# Altium PCB ESP32-PicoDK.PcbDoc
Units mil, origin at the board's own origin, x right, y up, seen from the top; angles counter-clockwise.
Board outline 2257.6 x 1417.32 mil, 2 copper layers (Top1, Bottom2), stack 40.202 mil thick; 44 components, 58 nets, 212 pads, 76 vias.
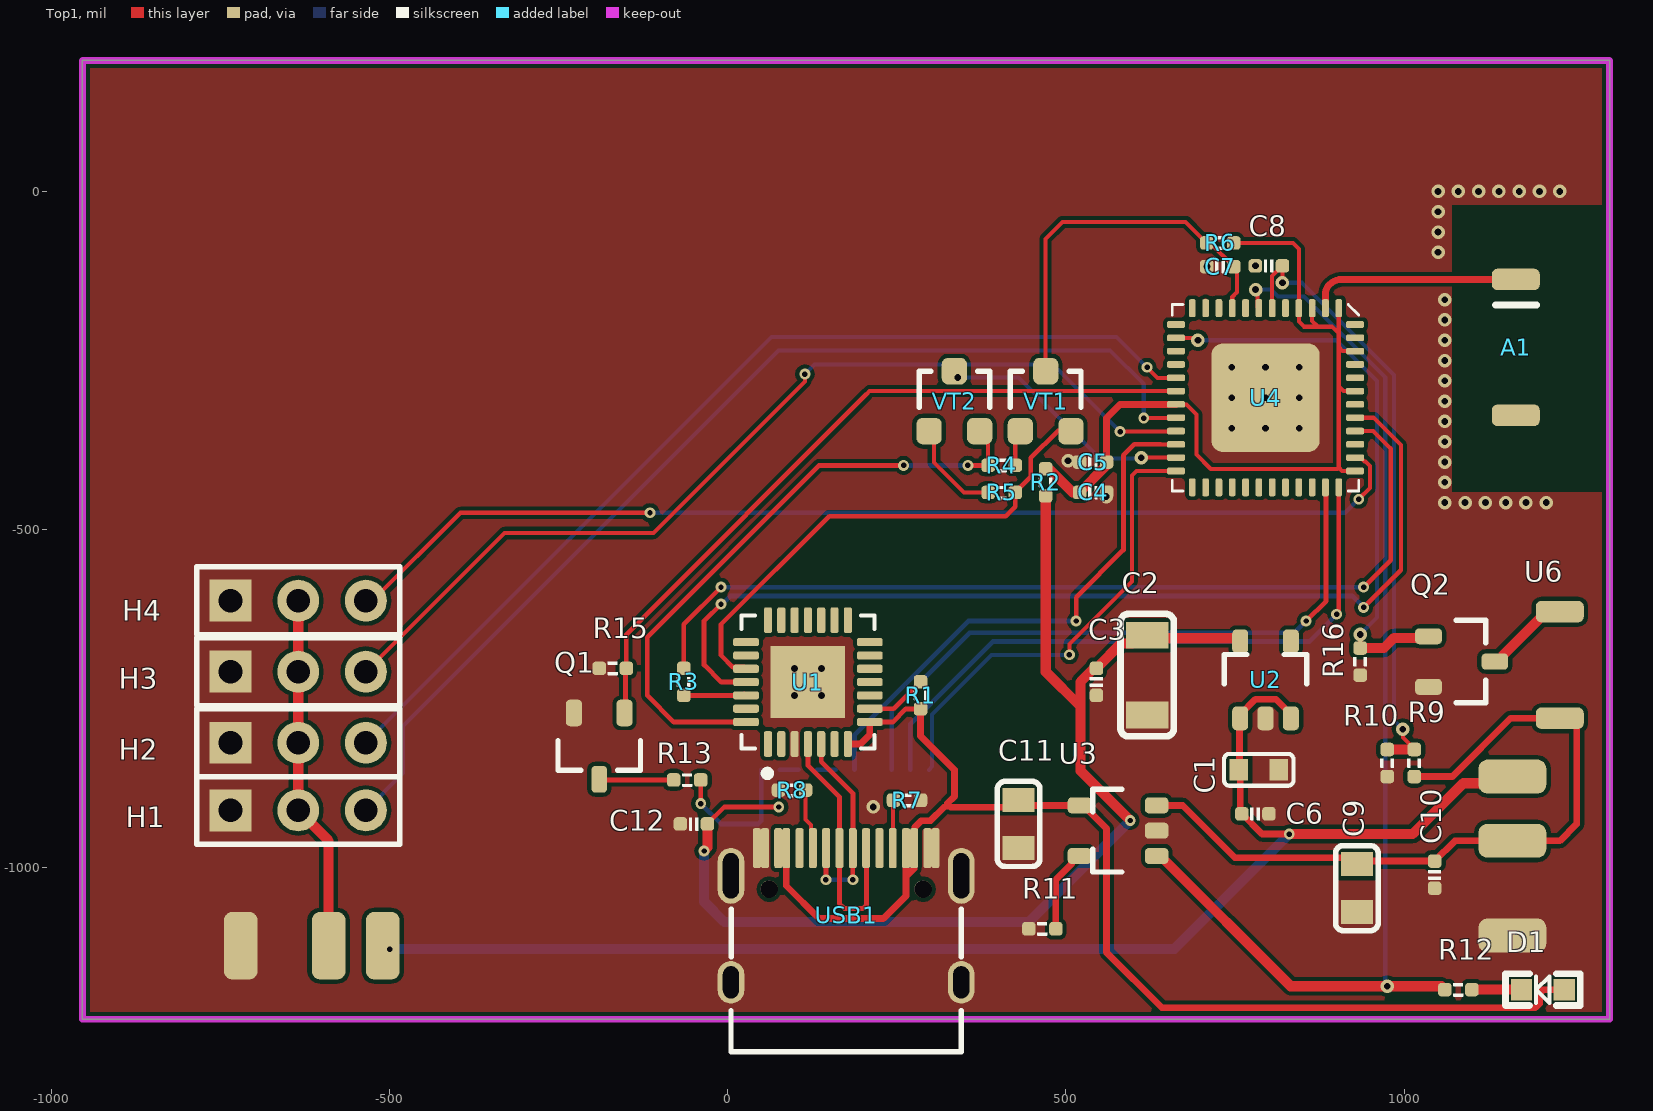
[diagram p0: Top1 view]
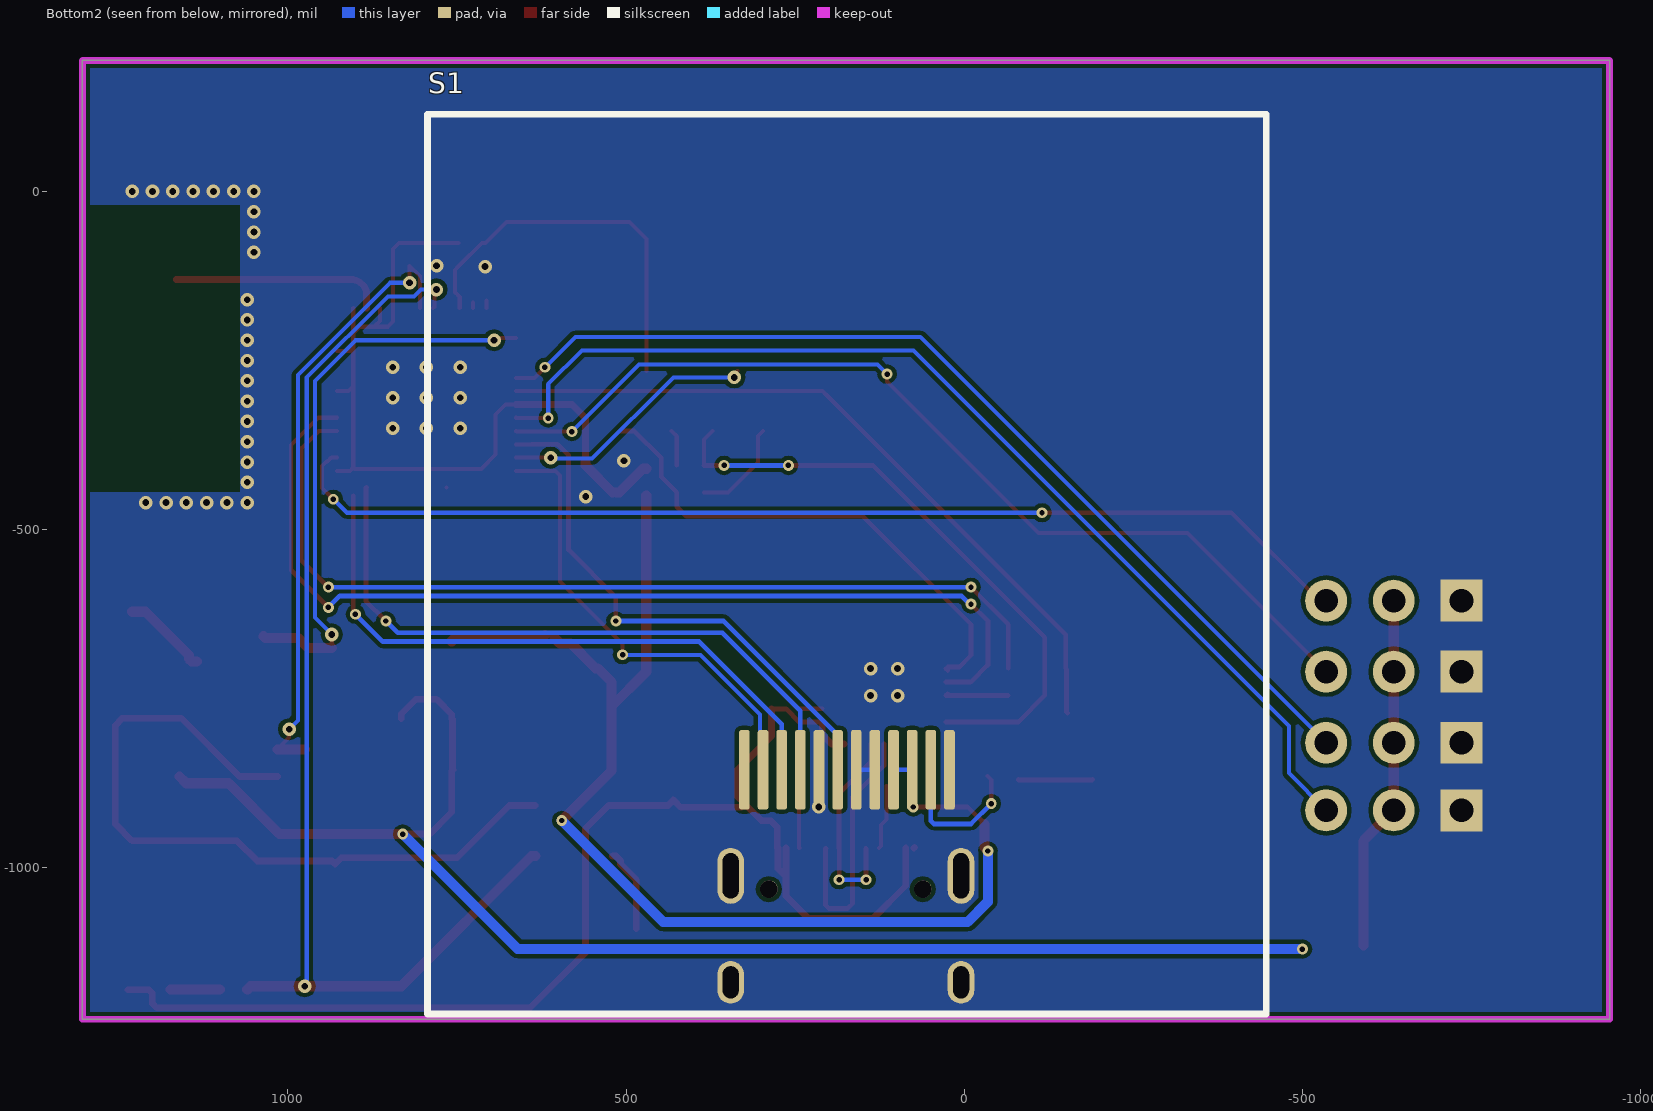
[diagram p1: Bottom2 view, seen from below]
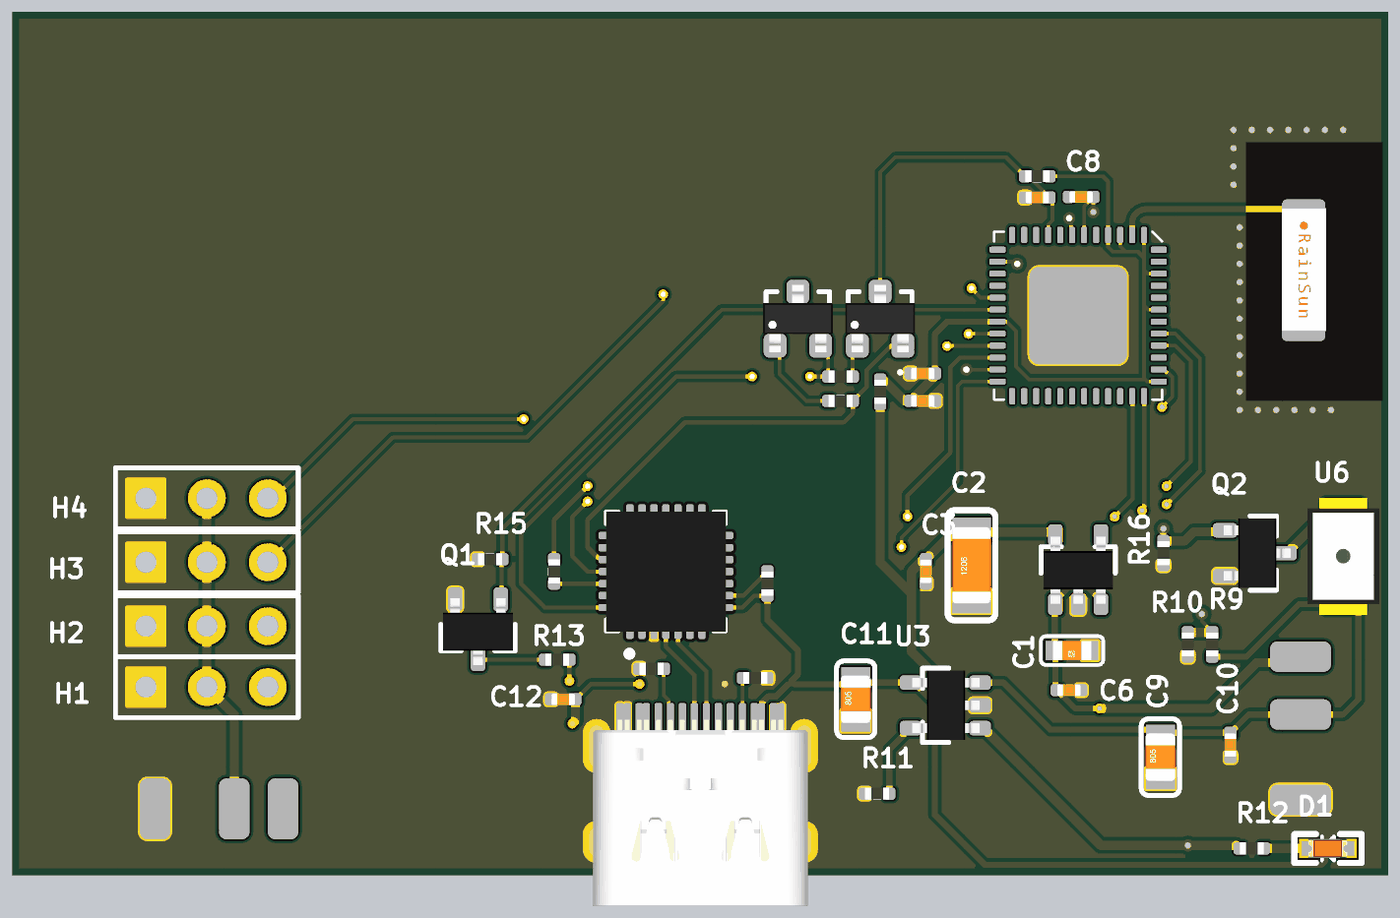
[diagram p2: 3D render of the assembled board from above, using the file's embedded part models]

## Layer stack, top to bottom
Top Solder: solder mask 0.4, Solder Resist, Dk 3.5
Top1: signal copper 1.4
Dielectric 1: core 37.4016, FR-4, Dk 4.2
Bottom2: signal copper 1.4
Bottom Solder: solder mask 0.4, Solder Resist, Dk 3.5

## Board outline
-954.01,-1223.65 -954.01,193.67 1303.59,193.67 1303.59,-1223.65

## Design rules (kind name [scope] priority, off if disabled: settings)
Clearance [All] p1: gap=6 ignorepadtopadclearanceinfootprint=FALSE
ComponentClearance [All] p1: gap=0 collisioncheckmode=3 verticalgap=0 showdistances=FALSE
DiffPairsRouting [All] p1: maxlimit=9 minlimit=9 mostfreqgap=9 toplayer_minwidth=4 toplayer_maxwidth=4 toplayer_prefwidth=4 bottomlayer_minwidth=4 bottomlayer_maxwidth=4 bottomlayer_prefwidth=4 maxuncoupledlength=500
FanoutControl Fanout_BGA [All] p1: bgadir=Out bgaviamode=Centered fanoutstyle=Auto fanoutdirection=Alternating viagrid=1 // Fanout_BGA (Default Rule)
HoleSize [All] p1: absolutevalues=TRUE maxlimit=10000 minlimit=8 maxpercent=80.000 minpercent=20.000
MinimumSolderMaskSliver [All] p1 off: minsoldermaskwidth=2
PlaneClearance [All] p1: clearance=8
PlaneConnect [All] p1: planeconnectstyle=Direct reliefexpansion=20 reliefentries=4 reliefconductorwidth=10 reliefairgap=10
PolygonConnect [All] p1: connectstyle=Direct reliefconductorwidth=10 reliefentries=4 polygonreliefangle="90 Angle" airgapwidth=10
RoutingVias [All] p1: holewidth=8 width=16 viastyle="Through Hole" minholewidth=6 minwidth=12 maxholewidth=28 maxwidth=50
SilkToBoardRegionClearance [All] p1 off:
SilkToSilkClearance [All] p1: silktosilkclearance=0
SilkToSolderMaskClearance [IsPad] p1: minsilkscreentomaskgap=0 clearancetoexposedcopper=TRUE
SolderMaskExpansion [All] p1: expansion=3
Width [All] p1: maxlimit=10000 minlimit=6 preferedwidth=7
20 further rules are at their usual default settings.

## Components (designator, comment, footprint, x,y, rotation, side; value= is the part's Value field where it differs from the comment)
A1 "RAINSUN" ANT-Rainsun-AN5120 1165,-230 r270 top
C1 "106" 电容_C0603 785,-855 r180 top
C2 "22uF" 电容_C1206 620,-715 r90 top
C3 "104" CAP_0402 545,-725 r90 top
C4 "10uF" CAP_0402 540,-445 r180 top value=0.1u
C5 "0.1uF" CAP_0402 540,-400 r0 top value=0.1u
C6 "104" CAP_0402 780,-920 r180 top
C7 "1uF" CAP_0402 728,-111.11 r180 top value=0.1u
C8 "0.1uF" CAP_0402 800,-110 r0 top value=0.1u
C9 "4.7UF" 电容_C0805 930,-1030 r90 top
C10 "104" CAP_0402 1045,-1010 r270 top
C11 "4.7UF" 电容_C0805 430,-935 r90 top
C12 "0.1uF" CAP_0402 -50,-935 r0 top value=0.1u
D1 "red" LED_0603 1205,-1180 r180 top
H1 "GP26-2520WV-3P" PIN2.54_1*3 -635,-915 r0 top
H2 "GP26-2520WV-3P" PIN2.54_1*3 -635,-815 r0 top
H3 "GP26-2520WV-3P" PIN2.54_1*3 -635,-710 r0 top
H4 "GP26-2520WV-3P" PIN2.54_1*3 -635,-605 r0 top
Q1 "AO3400A" SOT23-3 -190,-820 r270 top
Q2 "AO3400A" SOT23-3 1085,-695 r0 top
R1 "10K" RES_0402 285,-745 r90 top value=22R
R2 "0R" RES_0402 470,-430 r90 top value=22R
R3 "200R" RES_0402 -65,-725 r270 top value=22R
R4 "12K" RES_0402 405,-405 r0 top value=22R
R5 "12K" RES_0402 405,-445 r180 top value=22R
R6 "10K" RES_0402 728,-76.11 r180 top value=22R
R7 "5.1K" RES_0402 265,-900 r0 top value=22R
R8 "5.1K" RES_0402 95,-885 r180 top value=22R
R9 "100K" RES_0402 1015,-845 r270 top value=22R
R10 "100K" RES_0402 975,-845 r90 top value=22R
R11 "2K" RES_0402 465,-1090 r0 top
R12 "1K" RES_0402 1080,-1180 r0 top
R13 "10R" RES_0402 -60,-870 r0 top value=22R
R15 "10K" RES_0402 -170,-705 r0 top value=22R
R16 "10K" RES_0402 935,-695 r90 top value=22R
S1 "LCD-240x240" LCD-240x240-FlUSH-154 173.45,-545.94 r180 bottom locked
U1 "CP2102" QFN-28 118.5,-725.32 r90 top value=Value
U2 "LP5907-3.3" SOT23-5 795,-720 r90 top
U3 "MCP73831" SOT23-5 575,-945 r180 top
U4 "ESP32_SIP" QFN-48_7X7 795,-305 r270 top
U6 "DET402" DET402 1230,-700 r90 top
USB1 "Type-C" Type-C-TOP 175,-1070 r270 top locked
VT1 "S8050" SMT_TRIODE_NPN 470,-310 r0 top
VT2 "S8050" SMT_TRIODE_NPN 335,-310 r0 top

## Footprints (in the part's own frame and the unit in brackets; to place one, negate y for a bottom-side part, rotate by r counter-clockwise, add the part's x,y. Pads: shape width x height; smd on the part's side, far side on the other; paste and mask are expansions set on the pad)
ANT-Rainsun-AN5120 [mm] "选择焊盘"
  rrect50% 0.8x1.8 smd: 1(-2.54,0) ""(2.563,0)
  silkscreen extent -1.57,-0.76 -1.57,0.79, body extent -2.57,-0.91 2.54,0.94, height 1.32
CAP_0402 [mil]
  rrect50% 20x20 smd: 1(-20,0) 2(20,0)
  silkscreen extent -7,-9 7,9, body extent -20,-10 20,10, height 20
DET402 [mm]
  rrect50% 0.8x1.8 smd: 1(-2,0) 2(2,0)
  body extent -2.45,-1.5 2.44,1.5, height 2.03
LCD-240x240-FlUSH-154 [mm]
  rrect50% 0.4x3 smd: 1(3.851,-7.85) 2(3.151,-7.85) 3(2.451,-7.85) 4(1.751,-7.85) 5(1.051,-7.85) 6(0.351,-7.85) 7(-0.349,-7.85) 8(-1.049,-7.85) 9(-1.749,-7.85) 10(-2.449,-7.85) 11(-3.149,-7.85) 12(-3.849,-7.85)
  silkscreen extent -15.75,-17.02 15.75,16.76, body extent -15.7,-17.02 15.7,16.76
LED_0603 [mm]
  rect 0.8x0.8 smd paste-0.1: A(-0.8,0) K(0.8,0)
  silkscreen extent -1.4,-0.6 1.4,0.6, body extent -0.8,-0.4 0.82,0.4, height 0.6
PIN2.54_1*3 [mil]
  rect 62x62 hole 35: 1(-100,0)
  round 62 hole 35: 2(0,0) 3(100,0)
  silkscreen extent -150,-50 150,50
QFN-28 [mil]
  rrect50% 38x12 smd mask+5: 1(-91.5,59.06) 2(-91.5,39.37) 3(-91.5,19.68) 4(-91.5,0) 5(-91.5,-19.69) 6(-91.5,-39.37) 7(-91.5,-59.06) 15(91.5,-59.06) 16(91.5,-39.37) 17(91.5,-19.69) 18(91.5,0) 19(91.5,19.68) 20(91.5,39.37) 21(91.5,59.06)
  rrect50% 12x38 smd mask+5: 8(-59.06,-91.5) 9(-39.37,-91.5) 10(-19.68,-91.5) 11(0,-91.5) 12(19.68,-91.5) 13(39.37,-91.5) 14(59.06,-91.5) 22(59.06,91.5) 23(39.37,91.5) 24(19.68,91.5) 25(0,91.5) 26(-19.68,91.5) 27(-39.37,91.5) 28(-59.06,91.5)
  rect 106.3x110.24 smd: 29(0,0)
  silkscreen extent -140,-98 98,98, body extent -98,-98 98,98, height 35
QFN-48_7X7 [mm]
  rrect50% 0.675x0.25 smd: 1(-3.363,2.75) 2(-3.363,2.25) 3(-3.363,1.75) 4(-3.363,1.25) 5(-3.363,0.75) 6(-3.363,0.25) 7(-3.363,-0.25) 8(-3.363,-0.75) 9(-3.363,-1.25) 10(-3.363,-1.75) 11(-3.363,-2.25) 12(-3.363,-2.75) 25(3.363,-2.75) 26(3.363,-2.25) 27(3.363,-1.75) 28(3.363,-1.25) 29(3.363,-0.75) 30(3.363,-0.25) 31(3.363,0.25) 32(3.363,0.75) 33(3.363,1.25) 34(3.363,1.75) 35(3.363,2.25) 36(3.363,2.75)
  rrect50% 0.25x0.675 smd: 13(-2.75,-3.363) 14(-2.25,-3.363) 15(-1.75,-3.363) 16(-1.25,-3.363) 17(-0.75,-3.363) 18(-0.25,-3.363) 19(0.25,-3.363) 20(0.75,-3.363) 21(1.25,-3.363) 22(1.75,-3.363) 23(2.25,-3.363) 24(2.75,-3.363) 37(2.75,3.363) 38(2.25,3.363) 39(1.75,3.363) 40(1.25,3.363) 41(0.75,3.363) 42(0.25,3.363) 43(-0.25,3.363) 44(-0.75,3.363) 45(-1.25,3.363) 46(-1.75,3.363) 47(-2.25,3.363) 48(-2.75,3.363)
  rrect20% 4.064x4.064 smd: 49(0,0)
  silkscreen extent -3.5,-3.5 3.5,3.5, body extent -3.5,-3.5 3.5,3.5, height 1
RES_0402 [mil]
  rrect50% 20x20 smd: 1(-20,0) 2(20,0)
  silkscreen extent -7,-10 7,10, body extent -20,-10 20,10, height 14
SMT_TRIODE_NPN [mm] "Surface mount NPN transistor, package SOT-23"
  rrect50% 0.95x1 smd: 1(-0.95,-1.125) 2(0.95,-1.125) 3(0,1.125)
  silkscreen extent -1.33,-0.22 1.32,1.13, body extent -1.45,-1.4 1.45,1.4, height 1.3
SOT23-3 [mm] "SOT23, 3-Leads, Body 3.1x3.0mm (max), Pitch 0.95mm, IPC Medium Density"
  rrect50% 1x0.6 smd: 1(-1.246,0.95) 2(-1.246,-0.95) 3(1.246,0)
  silkscreen extent -0.2,-1.55 0.9,1.55, body extent -1.3,-1.45 1.5,1.45, height 1.2
SOT23-5 [mm] "SOT23, 3-Leads, Body 3.1x3.0mm (max), Pitch 0.95mm, IPC Medium Density"
  rrect50% 0.889x0.6 smd: 1(-1.5,0.95) 2(-1.5,0) 3(-1.5,-0.95) 4(1.396,-0.95) 5(1.396,0.95)
  silkscreen extent -0.2,-1.55 0.9,1.55, body extent -1.48,-1.45 1.32,1.45, height 1.2
Type-C-TOP [mm]
  round 0.65 hole 0.65: 0(-0.98,2.89) 0(-0.98,-2.89)
  oval 1.6x1 hole 0.6 slot 1.2 at 0 deg: 1(2.52,4.325) 2(2.52,-4.325)
  oval 2.1x1 hole 0.6 slot 1.7 at 0 deg: 3(-1.48,-4.325) 4(-1.48,4.325)
  rrect50% 1.5x0.3 smd: A1(-2.52,-3.35) A4(-2.52,-2.55) A5(-2.52,-1.25) A6(-2.52,-0.25) A7(-2.52,0.25) A8(-2.52,1.25) A9(-2.52,2.55) A12(-2.52,3.35) B1(-2.52,3.05) B4(-2.52,2.25) B5(-2.52,1.75) B6(-2.52,0.75) B7(-2.52,-0.75) B8(-2.52,-1.75) B9(-2.52,-2.25) B12(-2.52,-3.05)
  silkscreen extent -0.22,-4.33 5.12,4.33, body extent -2.57,-4.48 5.18,4.48, height 3.26
电容_C0603 [mm]
  rect 0.7x0.8 smd: 1(-0.75,0) 2(0.75,0)
  silkscreen extent -1.3,-0.6 1.3,0.6, body extent -0.8,-0.4 0.8,0.4, height 0.3
电容_C0805 [mm]
  rect 0.9x1.2 smd: 1(-0.9,0) 2(0.9,0)
  silkscreen extent -1.6,-0.8 1.6,0.8, body extent -1,-0.62 1,0.63, height 0.77
电容_C1206 [mm]
  rect 1x1.6 smd: 1(-1.5,0) 2(1.5,0)
  silkscreen extent -2.3,-1 2.3,1, body extent -1.6,-0.8 1.6,0.8, height 1

## Part data
A1: library part ANT-Rainsun-AP5120
C1 C2 C3 C6 C9 C10 C11: library part cap, U=50V, 参数=Cap,0805,X7R,104K,50V,125C,±1
  C1: C=106
  C2: C=22uF
  C3 C6 C10: C=104
  C9 C11: C=4.7UF
C4 C5 C7 C8 C12: library part 电容-0402, "Capacitor"
D1: library part LED, 参数=LED,0603,Re
H1 H2 H3 H4: BOM_JLCPCB Part Class="Extended Part", BOM_Manufacturer=GEPU(歌普, BOM_Manufacturer Part=GP26-2520WV-3P, BOM_Supplier=LCSC, BOM_Supplier Part=C2681738, Contributor=LCSC, spicePre=H, spiceSymbolName=GP26-2520WV-3P
Q1 Q2: "N-MOS"
R1 R2 R3 R4 R5 R6 R7 R8 R9 R10 R13 R15 R16: library part 电阻-0402, "Resistor"
R11 R12: library part Res, P=1/8W, 参数=Res,0805,0R,±1%,1/8W,100ppm,15
  R11: R=2K
  R12: R=1K
S1: "显示屏"
U1: "USBתTTL", MFG #1="SILICON LABS", PART DESC="SINGLE-CHIP USB TO UART BRIDGE, QFN28, RoHS.", PART NUMBER=CP2102, RefDes=RefDes, Type=DEV
U2: library part LP5907, "LDO"
U3: "线性充电管理控制器"
U4: library part ESP32-PICO
USB1: library part USB-Type-C-TOP
VT1 VT2: library part SMT_TRIODE_NPN, "Surface mount NPN transistor, package SOT-23"

## Free pads (board coordinates)
  rrect50% 50x100 smd: ""(-720,-1115) ""(-590,-1115) ""(-510,-1115)
  rrect50% 100x50 smd: ""(1160,-1100) ""(1160,-960) ""(1160,-865)

## Via types
v1: diameter 20, hole 10, Top1 to Bottom2, tented both sides, 52 vias
v2: diameter 16, hole 8, Top1 to Bottom2, 24 vias

## Nets (pads, with @x,y where several pads share a name; then routed paths per layer and width w, separated by ;. In a path a pad name is that pad's centre, name@x,y a point inside that pad or via, vN(x,y) a via of type N, cw(c..) or ccw(c..) an arc to the next point about the centre after c; other vN are vias at no path point)
3V3A: C4.2 C5.2 R2.2 R6.1 U4.1 U4.3 U4.4 U4.19 U4.37 U4.43 U4.46 | length 1232.2
  Top1 w6: U4.19 677.84,-314.84 693,-330 693,-389 714,-410 901.54,-410 903.27,-408.27 ; R6.1 835.32,-76.11 844.21,-85 U4.4 844.21,-192.21 852,-200 872.63,-200 ; U4.3 863.9,-191.26 872.63,-200 ; U4.1 903.27,-210 ; U4.37 908.27,-413.27 903.27,-408.27 ; U4.43 910.16,-295.16 903.27,-288.27 ; U4.46 909.1,-236.1 903.27,-230.27 ; 872.63,-200 893.27,-200 903.27,-210 ; 903.27,-408.27 903.27,-288.27 ; 903.27,-288.27 903.27,-230.27 ; 903.27,-230.27 903.27,-210
  Top1 w10: C5.2 560,-335 580,-315 662.46,-315 U4.19
  Top1 w15: R2.2 475,-410 510,-445 C4.2@515,-445 ; C4.2 560,-405 C5.2
+5: H1.2 H2.2 H3.2 H4.2 pad.@-590,-1115 | length 528.6
  Top1 w15: H4.2 H3.2 -635,-780 H2.2 H1.2 -590,-960 pad.@-590,-1115
BAT_DET: C8.2 R9.1 R10.2 U4.6 | length 921.5
  Top1 w6: U4.6 804.84,-125.16 C8.2 v1(820,-135) ; v1(998,-795) 998,-807 1015,-824 R9.1
  Top1 w15: R10.2 R9.1
  Bottom2 w6: v1(820,-135) 848.67,-135 985,-271.33 985,-782 v1(998,-795)
BUZZ: Q2.1 R16.2 U4.14 | length 837.1
  Top1 w6: U4.14 688.71,-216.42 692.29,-220 v1(695,-220) ; R16.2 v1(935,-655)
  Top1 w15: R16.2 970,-675 985.01,-659.99 1033.55,-659.99 Q2.1
  Bottom2 w6: v1(695,-220) 899.73,-220 960,-280.27 960,-630 v1(935,-655)
CHG_DET: R12.1 U3.1 U4.7 | length 1684
  Top1 w6: v1(780.31,-145) 780.31,-147.71 783.24,-150.63 783.24,-170.7 U4.7
  Top1 w15: U3.1 639.74,-982.4 832.34,-1175 v1(975,-1175) 1055,-1175 R12.1
  Bottom2 w6: v1(780.31,-145) 803.13,-145 813.13,-155 851.7,-155 972,-275.3 972,-1172 v1(975,-1175)
CP_Rx: U1.25 U4.41 | length 1482
  Top1 w6: U4.41 954.53,-334.53 995,-375 995,-560
  Top1 w7: v2(-10,-610) -35,-635 -35,-700 -9.68,-725.32 U1.25 ; v2(940,-615) 995,-560
  Bottom2 w7: v2(-10,-610) -7.84,-610 4.16,-598 923,-598 v2(940,-615)
CP_Tx: R3.1 U4.40 | length 1377.6
  Top1 w6: U4.40 954.21,-354.21 980,-380
  Top1 w7: R3.1 -65,-640 v2(-10,-585) ; v2(940,-585) 980,-545 980,-380
  Bottom2 w7: v2(-10,-585) v2(940,-585)
DTR: R4.1 U1.28 VT2.2 | length 913.6
  Top1 w6: VT2.2 385,-366.89 R4.1
  Top1 w7: U1.28 -79.76,-784.37 -119.13,-745 -119.13,-659.13 135,-405 v2(260,-405) ; v2(355,-405) R4.1
  Bottom2 w7: v2(260,-405) v2(355,-405)
EN: C7.1 R6.2 U4.9 VT1.3 | length 578
  Top1 w6: VT1.3 470,-70 495,-45 676.89,-45 R6.2 713,-76.11 C7.1 753,-116.11 753,-149 745.79,-156.21 U4.9
FLASH_CLK: U4.31
FLASH_CS: U4.25
FLASH_SD0: U4.27
FLASH_SD1: U4.33
FLASH_SD2: U4.30
FLASH_SD3: U4.32
GND: C1.1 C2.1 C3.1 C4.1 C5.1 C6.1 C7.2 C8.1 C9.1 C10.2 C11.1 C12.1 H1.1 H2.1 H3.1 H4.1 pad.@1160,-1100 pad.@-720,-1115 Q1.2 Q2.2 R7.2 R8.2 R10.1 R11.1 R15.1 R16.1 S1.1 S1.5 S1.6 S1.8 U1.3 U1.29 U2.2 U3.2 U4.49 USB1.1 USB1.2 USB1.3 USB1.4 USB1.A1 USB1.A12 USB1.B1 USB1.B12 | length 27.6
  Bottom2 w7: S1.5 S1.6
  other v1: 215,-909.84 98.5,-745.32 138.5,-745.32 98.5,-705.32 138.5,-705.32 1060,-460 1090,-460 1120,-460 1150,-460 1180,-460 1210,-460 559.69,-451 1060,-430 1060,-400 503,-398 1060,-370 745,-350 795,-350 845,-350 1060,-340 1060,-310 745,-305 795,-305 845,-305 1060,-280 745,-260 795,-260 845,-260 1060,-250 1060,-220 1060,-190 1060,-160 708.32,-111.11 780,-110 1050,-90 1050,-60 1050,-30 1050,0 1080,0 1110,0 1140,0 1170,0 1200,0 1230,0
GPIO0: U4.23 VT2.3 | length 400.3
  Top1 w6: VT2.3 344.29,-275 v1(340,-275) ; v1(611.42,-393.58) U4.23
  Bottom2 w6: v1(340,-275) 430,-275 550,-395 615,-395 616.42,-393.58 v1(611.42,-393.58)
GPIO2: S1.7 U4.22 | length 807.1
  Top1 w6: 640,-373.9 U4.22
  Top1 w7: v2(515,-635) 515,-600 585,-530 585,-390.16 601.26,-373.9 640,-373.9
  Bottom2 w7: S1.7 187.2,-803.82 356.02,-635 v2(515,-635)
GPIO4: S1.11 U4.24 | length 694.6
  Top1 w6: v2(505,-685) 505,-669.04 597.5,-576.54 597.5,-420 604.23,-413.27 U4.24
  Bottom2 w6: S1.11 302,-850.44 302,-773 390,-685 v2(505,-685)
GPIO5: U4.34
GPIO9: U4.28
GPIO10: U4.29 | length 0.3
  Top1 w6: U4.29@765.24,-437.62 U4.29
GPIO12: Q1.1 R15.2 U4.18 | length 1078.7
  Top1 w6: 205,-300 209.84,-295.16 U4.18
  Top1 w7: Q1.1 -151.3,-769.65 -151.3,-706.3 R15.2 -150,-655 205,-300
GPIO13: H1.3 U4.20 | length 1591.2
  Top1 w6: v2(615,-335) 615.24,-334.76 662.38,-334.76 U4.20
  Bottom2 w6: H1.3 -480,-860 -480,-790 75,-235 565,-235 615,-285 v2(615,-335)
GPIO14: H2.3 U4.17 | length 1471.2
  Top1 w6: v2(620,-260) 635.47,-275.47 U4.17
  Bottom2 w6: H2.3 65,-215 575,-215 v2(620,-260)
GPIO15: H3.3 U4.21 | length 1433.4
  Top1 w6: H3.3 -330,-505 -110,-505 114,-281 v2(114,-270) ; v2(580,-355) 580.39,-354.61 662.22,-354.61 U4.21
  Bottom2 w6: v2(114,-270) 128,-256 481,-256 v2(580,-355)
GPIO18: S1.9 U4.35 | length 970.5
  Top1 w7: v2@851.22,-638.78 v2(855,-635) 884.5,-605.5 884.5,-438.3 U4.35
  Bottom2 w7: S1.9 242.32,-767.68 357.5,-652.5 837.5,-652.5 v2(855,-635)
GPIO19: H4.3 U4.38 | length 1613.3
  Top1 w6: H4.3 -525,-605 -395,-475 v2(-115,-475) ; U4.38 935.75,-393.58 941.16,-399 942.61,-399 949.67,-406.06 949.67,-438.13 v2(932.8,-455)
  Bottom2 w6: v2(-115,-475) 912.8,-475 v2(932.8,-455)
GPIO21: U4.42
GPIO22: U4.39
GPIO23: S1.10 U4.36 | length 941.3
  Top1 w7: v2(900,-625) 903.27,-621.73 U4.36@903.27,-450
  Bottom2 w7: S1.10 269.88,-787.44 391.82,-665.5 859.5,-665.5 v2(900,-625)
GPIO26: U4.15
GPIO27: U4.16
GPIO32: U4.12
GPIO33: U4.13
GPIO34: U4.10 | length 8.4
  Top1 w6: U4.10 U4.10@726.1,-164.25
GPIO35: U4.11 | length 11.2
  Top1 w6: U4.11 U4.11@706.42,-161.42
LCD_LEDK: R13.2 S1.2 | length 222.4
  Top1 w6: R13.2 R13.2@-34.23,-864.23
  Top1 w7: v2(-40,-905) R13.2
  Bottom2 w7: v2(-40,-905) -10,-935 45,-935 49.41,-930.59 S1.2
NetA1_1: A1.1 U4.2 | length 314.2
  Top1 w10: U4.2 883.58,-151.91 cw(c903.96,-151.91) 889.55,-137.5 cw(c907.66,-155.61) 907.66,-130 A1.1
NetD1_K: D1.K R12.2 | length 73.5
  Top1 w15: R12.2 D1.K
NetQ1_3: Q1.3 R13.1 | length 111.5
  Top1 w6: R13.1 R13.1@-80,-868.92
  Top1 w7: Q1.3 -189.06,-870 R13.1
NetQ2_3: Q2.3 U6.2 | length 129.6
  Top1 w15: Q2.3 1141.93,-695 1146.24,-690.69 1146.24,-685.33 1210.31,-621.26 U6.2
NetR1_2: R1.2 U1.9 | length 91.4
  Top1 w7: U1.9 245.31,-764.69 R1.2
NetR3_2: R3.2 U1.26 | length 95.5
  Top1 w7: R3.2 U1.26 U1.26@24.5,-742.5
NetR4_2: R4.2 VT1.1 | length 53.9
  Top1 w6: R4.2 425,-361.89 VT1.1
NetR5_2: R5.2 VT2.1 | length 148
  Top1 w6: VT2.1 305,-361.69 305,-401 349,-445 R5.2
NetR7_1: R7.1 USB1.B5 | length 77.2
  Top1 w6: USB1.B5 244.45,-970.24 244.45,-894.55 R7.1@245,-894
NetR8_1: R8.1 USB1.A5 | length 96.3
  Top1 w6: R8.1@115,-879 R8.1 115,-928.75 122.88,-936.64 122.88,-967.88 USB1.A5
NetR11_2: R11.2 U3.5 | length 125.2
  Top1 w10: R11.2 485,-1017.46 508.11,-994.34 508.11,-989.14 514.86,-982.4 U3.5
RTS: R5.1 U1.24 VT1.2 | length 758.8
  Top1 w7: U1.24@24.5,-708.13 U1.24 24.5,-703.13 7.51,-703.13 -10,-685.62 -10,-640 150,-480 410.9,-480 425,-465.9 R5.1 448,-422 448,-394 487.71,-354.29 VT1.2
SENSOR_VN: U4.8
SENSOR_VP: U4.5
USB-PWR-DM: U1.5 USB1.A7 USB1.B7 | length 307.1
  Top1 w7: U1.5 138.19,-843.18 185,-890 185,-970.63 USB1.A7 184.92,-970.87 184.92,-1017.42 v2(185,-1017.5) ; v2(145,-1017.5) 145.24,-1017.26 145.24,-971.02 USB1.B7
  Bottom2 w7: v2(145,-1017.5) v2(185,-1017.5)
USB-PWR-DP: U1.4 USB1.A6 USB1.B6 | length 384.5
  Top1 w7: U1.4 118.5,-848.5 165.16,-895.16 USB1.A6 165.16,-1052.66 172.5,-1060 200,-1060 205,-1055 205,-971.26 USB1.B6
VBAT: C9.2 C10.1 pad.@1160,-960 R9.2 U3.3 U6.1 | length 1107.5
  Top1 w10: U3.3 672.6,-907.6 750,-985 920.43,-985 C9.2 934.57,-990 C10.1 1075,-960 1160,-960 1230,-960 1255,-935 1255,-789.27 1244.47,-778.74 U6.1 1157.51,-778.74 1071.25,-865 R9.2
VBAT_IN: C1.2 C6.2 pad.@1160,-865 pad.@-510,-1115 U2.1 U2.3 | length 2097.1
  Top1 w10: v2(830,-950) 790,-950 C6.2 757.74,-917.74 757.74,-857.26 C1.2 756.54,-853.94 756.54,-780.12 U2.1 757.6,-773.37 780.41,-750.56 810.08,-750.56 832.4,-772.88 U2.3
  Top1 w15: v2(830,-950) 1012.41,-950 1087.5,-874.91 1150.09,-874.91 pad.@1160,-865
  Bottom2 w15: v2(-500,-1120) 660,-1120 v2(830,-950)
VCC_3V3: C2.2 C3.2 C12.2 R2.1 S1.3 S1.4 U2.5 | length 1802.1
  Top1 w7: C12.2 -5,-910 v2(75.32,-910) ; C2.2@605.44,-660.5 610,-655.94 C2.2
  Top1 w15: v2(-35,-975) -35,-974.73 -30,-969.73 C12.2 ; R2.1@470,-449.69 R2.1 470,-710 521.5,-761.5 ; v2(595,-930) 521.5,-856.5 521.5,-761.5 ; C2.2@605.44,-660.5 597.81,-668.13 581.87,-668.13 C3.2 541.5,-705 521.5,-725 521.5,-761.5 ; C2.2 624.56,-660.5 753.29,-660.5 757.6,-664.81 U2.5
  Bottom2 w7: S1.3 S1.4
  Bottom2 w15: v2(-35,-975) -35,-1050 -5,-1080 445,-1080 v2(595,-930)
VUSB: C11.2 D1.A R1.1 U1.7 U1.8 U3.4 USB1.A4 USB1.A9 USB1.B4 USB1.B9 | length 1960.3
  Top1 w7: U1.8 244.01,-784.37 263.38,-765 R1.1 ; 319.61,-910.39 330,-910.39 324.45,-904.84
  Top1 w10: USB1.A4@73.7,-969.88 USB1.A4 ; USB1.B9 86.42,-1026.42 135,-1075 230,-1075 263.58,-1041.42 263.58,-1013 ; U1.7 196,-816.82 210,-802.82 U1.8 ; USB1.B4 263.58,-1013 ; R1.1 285,-805 335,-855 335,-894.3 324.45,-904.84 ; 319.61,-910.39 299.74,-930.26 286.35,-930.26 276.3,-940.31 276.3,-969.88 USB1.A9 275.39,-1001.19 263.58,-1013 ; 330,-910.39 419.17,-910.39 C11.2 438.03,-907.6 U3.4 525.74,-907.6 560,-941.85 560,-1125 641.75,-1206.75 1193.81,-1206.75 1200.25,-1200.3 1200.25,-1185.86 1206.11,-1180 D1.A
pads on no net: A1. S1.12 U1.1 U1.2 U1.6 U1.10 U1.11 U1.12 U1.13 U1.14 U1.15 U1.16 U1.17 U1.18 U1.19 U1.20 U1.21 U1.22 U1.23 U1.27 U2.4 U4.26 U4.44 U4.45 U4.47 U4.48 USB1.0 USB1.A8 USB1.B8

## Polygon pours and split planes (outlines as drawn)
GND on Bottom2 "GND_L02_P001" (solid, remove dead copper, pour order 1): -1005,610 -1505,-1625 2225,-1510 2100,460
GND on Top1 "GND_L01_P000" (solid, remove dead copper, pour order 0): -1930,645 -1495,-1705 2065,-1310 2100,460

## Keep-outs
Keep-Out Layer:
  the board outline again, w10

## Other copper
Top1:
  pour cut-out: 1070,-20 1070,-445 1295,-445 1295,-20
Bottom2:
  pour cut-out: 1070,-20 1070,-445 1295,-445 1295,-20

## Silkscreen, mask and mechanical layers (free items; w line width, h text height)
Top Solder:
  rectangle: 1070,-445 1295,-20
Bottom Solder:
  rectangle: 1070,-445 1295,-20
Mechanical 1:
  lines w0.89: 174.79,-1223.65 174.79,193.67 ; -954.01,-1223.65 -954.01,193.67 ; -954.01,-1223.65 1303.59,-1223.65 ; -954.01,-1223.65 -954.01,193.67 ; -954.01,-1223.65 1303.59,-1223.65 ; -954.01,193.67 1303.59,193.67 ; -954.01,193.67 1303.59,193.67 ; 1303.59,-1223.65 1303.59,193.67 ; 1303.59,-1223.65 1303.59,193.67